# Altium PCB SDC23.PcbDoc
Units mil, origin at the board's own origin, x right, y up, seen from the top; angles counter-clockwise.
Board outline 3615 x 3030.02 mil, 2 copper layers (Top Layer, Bottom Layer); 44 components, 36 nets, 181 pads, 34 vias.
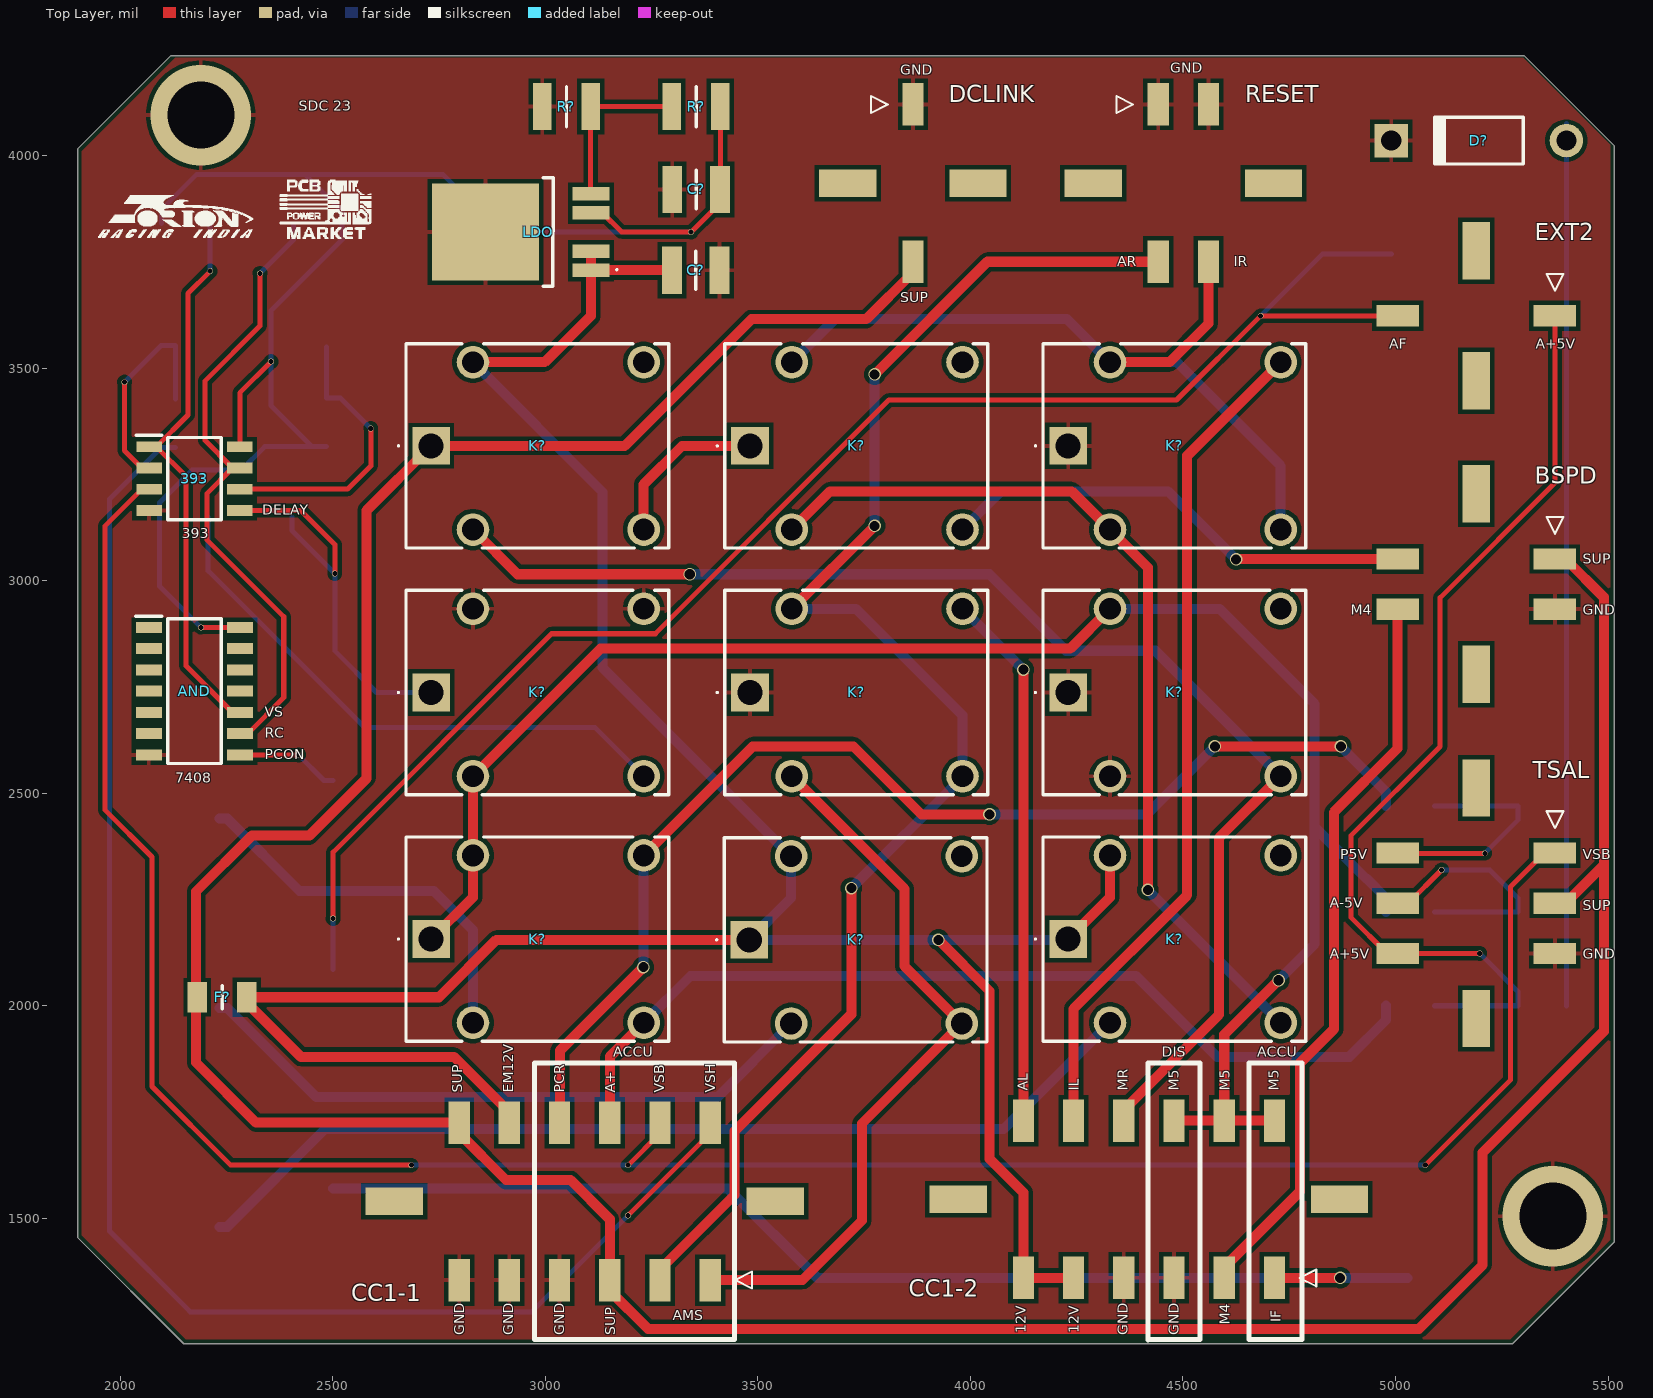
[diagram p0: Top Layer view]
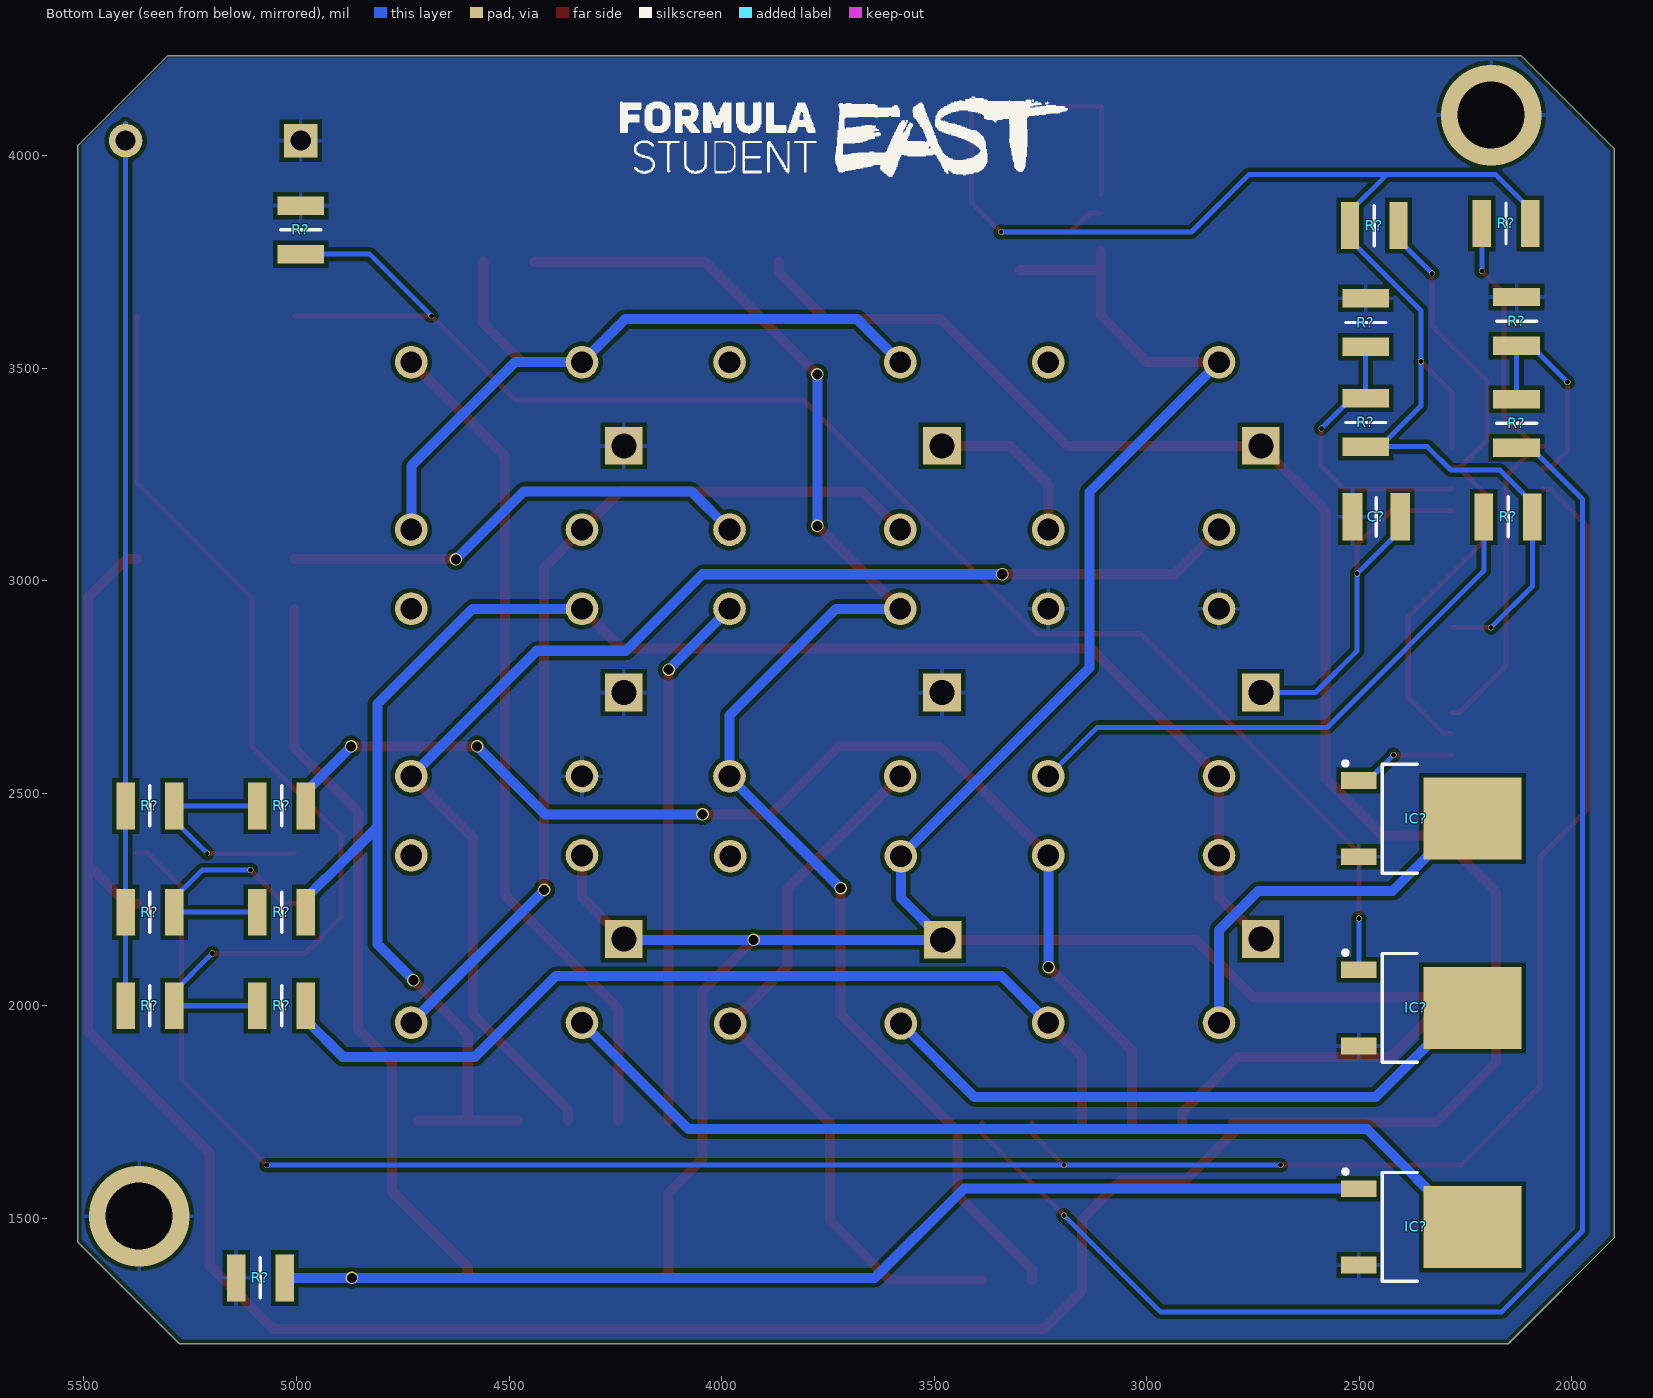
[diagram p1: Bottom Layer view, seen from below]
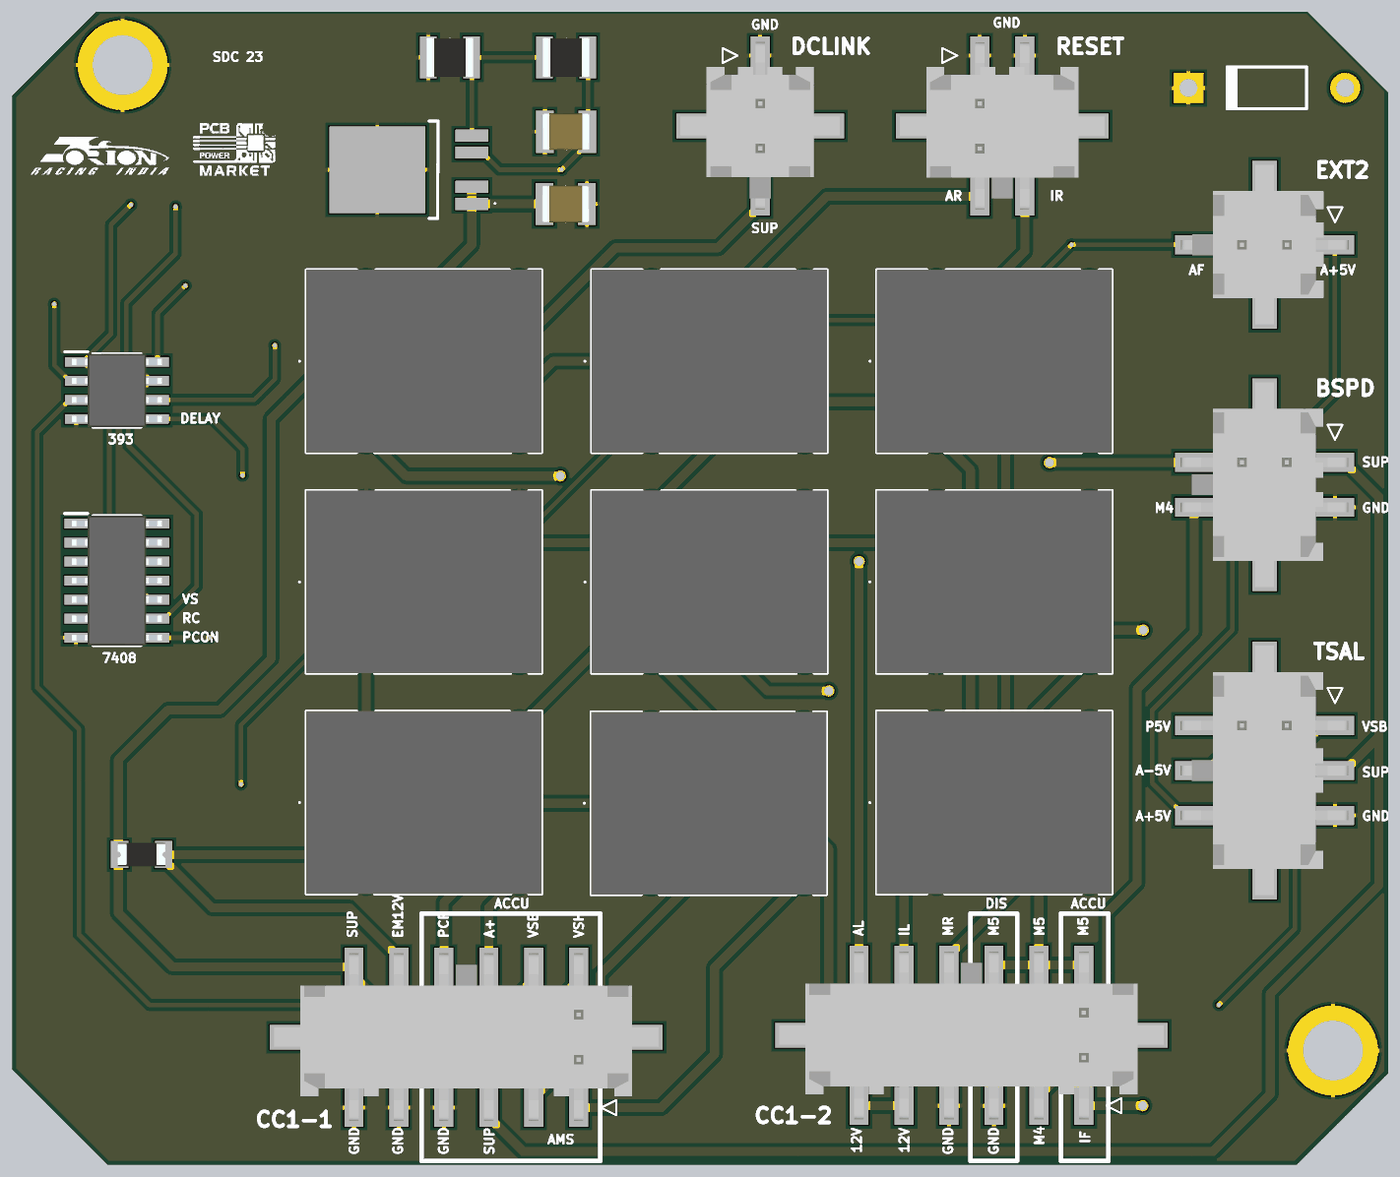
[diagram p2: 3D render of the assembled board from above, using the file's embedded part models]
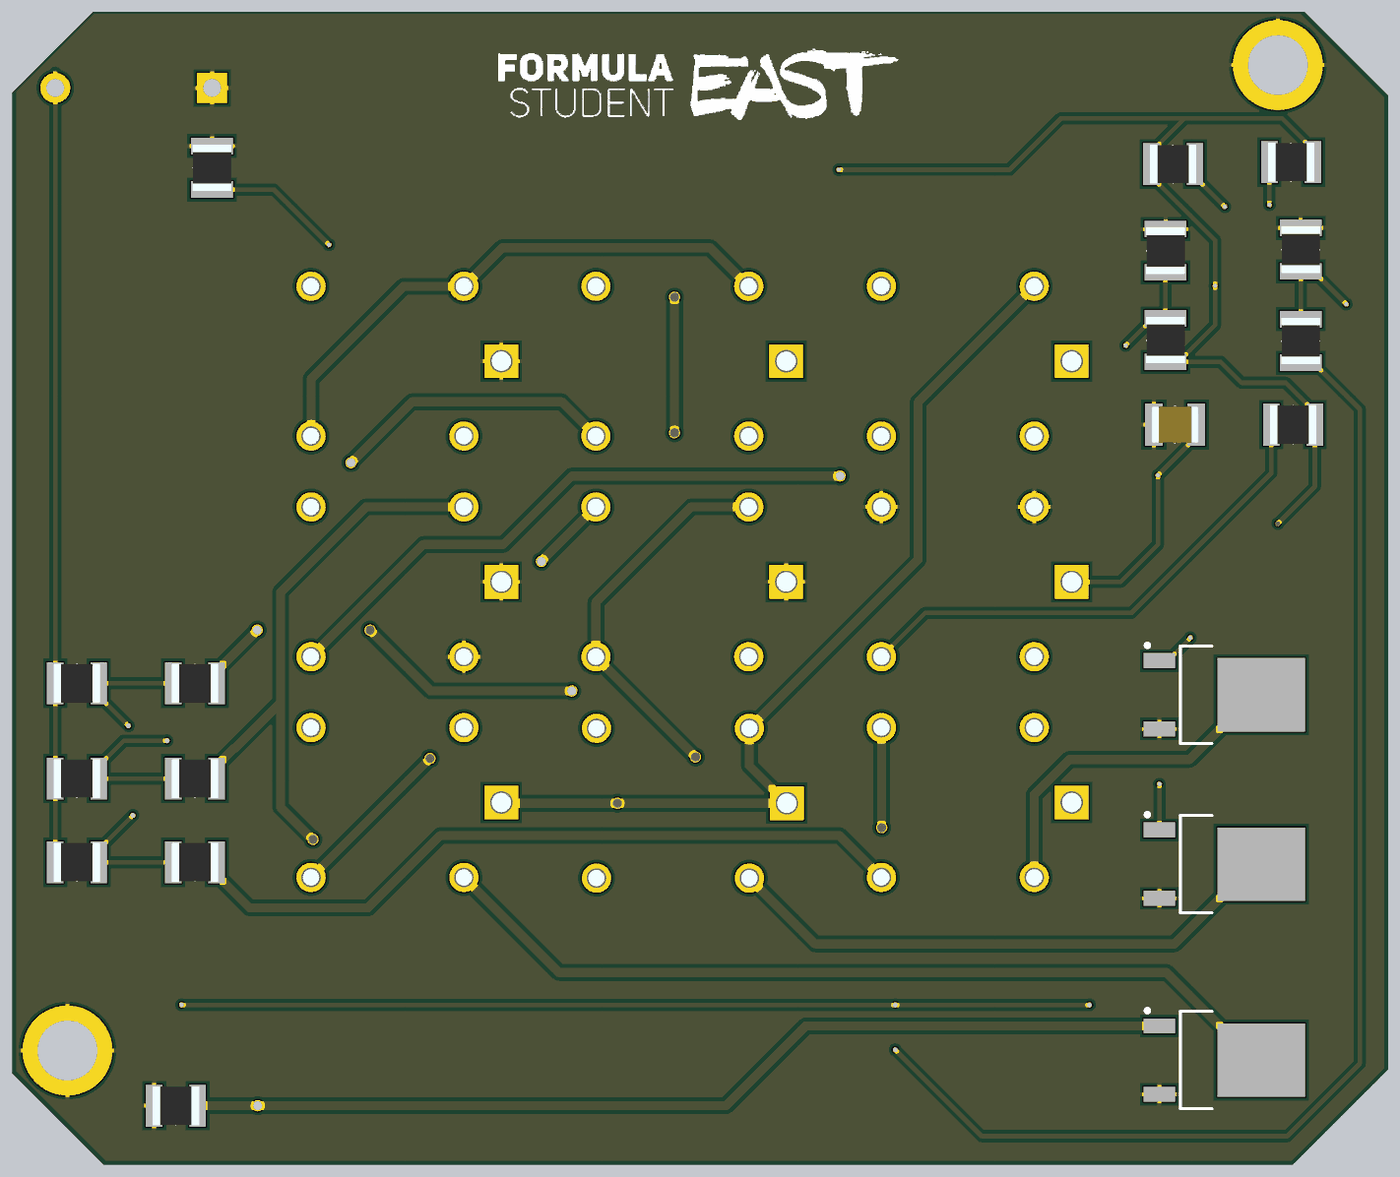
[diagram p3: 3D render of the assembled board from below, using the file's embedded part models]

## Layer stack, top to bottom
Top Solder: solder mask 0.4, Solder Resist, Dk 3.5
Top Layer: signal copper 1.4
Dielectric 1: dielectric 12.6, FR-4, Dk 4.8
Bottom Layer: signal copper 1.4
Bottom Solder: solder mask 0.4, Solder Resist, Dk 3.5

## Board outline
1900,4015 2119.98,4234.98 5302.18,4235.02 5515,4022.2 5515,1445 5275,1205 2150,1205 1900,1455

## Design rules (kind name [scope] priority, off if disabled: settings)
Clearance [All] p1: gap=10 ignorepadtopadclearanceinfootprint=FALSE
PolygonConnect [All] p1: connectstyle=Relief reliefconductorwidth=10 reliefentries=4 polygonreliefangle="90 Angle" airgapwidth=10
RoutingVias [All] p1: holewidth=23.62 width=29.53 viastyle="Through Hole" minholewidth=11.81 minwidth=13.78 maxholewidth=23.62 maxwidth=29.53
SolderMaskExpansion [All] p1: expansion=4 istentingtop=FALSE
Width [All] p1: maxlimit=23.62 minlimit=11.81 preferedwidth=23.62
30 further rules are at their usual default settings.

## Classes and differential pairs
component class SDC23: 393 AND BSPD C? CC1-1 CC1-2 D? DCLINK EXT2 F? IC? K? LDO R? RESET TSAL

## Components (designator, comment, footprint, x,y, rotation, side; value= is the part's Value field where it differs from the comment)
393 "LM393D" SOIC127P600X175-8N 2175,3240 r0 top
AND "MC74HC08ADG" SOIC127P600X175-14N 2175,2740 r0 top
BSPD "43045-0419" 43045-04YY_181920 5190,2992.01 r90 top
C? "10uF" CAPC3225X145N 2460,3150 r180 bottom
C? "10uF" CAPC3225X145N 3355,3920 r180 top
C? "10uF" CAPC3225X145N 3354.09,3730 r0 top
CC1-1 "43045-1219" 43045-12YY_181920 3092.83,1539.96 r0 top
CC1-2 "43045-1219" 43045-12YY_181920 4420,1545 r0 top
D? "Diode 1N4007" DO-41 5196,4035 r180 top
DCLINK "43045-0219" 43045-02YY_181920 3865,3935.04 r180 top
EXT2 "43045-0219" 43045-02YY_181920 5190,3622.95 r90 top
F? "NANOSMDC020F-2" NANOSMDC016F2 2240,2020 r180 top
IC? "STD10NF10T4" TO228P972X240-3N 2330,2440 r180 bottom
IC? "STD10NF10T4" TO228P972X240-3N 2330,1995 r180 bottom
IC? "STD10NF10T4" TO228P972X240-3N 2330,1480 r180 bottom
K? "SCA20-20-12VDC-C" SCA202012VDCC 3481.57,2736.85 r180 top
K? "SCA20-20-12VDC-C" SCA202012VDCC 2731.57,2736.85 r180 top
K? "SCA20-20-12VDC-C" SCA202012VDCC 2731.57,3316.85 r180 top
K? "SCA20-20-12VDC-C" SCA202012VDCC 3480,2155 r180 top
K? "SCA20-20-12VDC-C" SCA202012VDCC 4230,2156.85 r180 top
K? "SCA20-20-12VDC-C" SCA202012VDCC 3481.57,3316.85 r180 top
K? "SCA20-20-12VDC-C" SCA202012VDCC 2731.57,2156.85 r180 top
K? "SCA20-20-12VDC-C" SCA202012VDCC 4230,3316.85 r180 top
K? "SCA20-20-12VDC-C" SCA202012VDCC 4230,2736.85 r180 top
LDO "TLF1963TEATMA1" TLF1963TEATMA1 2940,3820 r90 top
R? "10K" RESC3126X60N 4990,3825 r270 bottom
R? "2.2K" RESC3126X60N 2485,3372.09 r270 bottom
R? "10K" RESC3126X60N 3355,4115 r180 top
R? "47K" RESC3126X60N 2150,3150 r0 bottom
R? "2,7K" RESC3126X60N 5345,2220 r180 bottom
R? "22K" RESC3126X60N 2130,3610 r270 bottom
R? "1K" RESC3126X60N 2130,3370 r270 bottom
R? "4.7K" RESC3126X60N 5035,2470 r180 bottom
R? "4.7K" RESC3126X60N 5035,2000 r180 bottom
R? "3.3K" RESC3126X60N 3050,4115 r180 top
R? "2.7K" RESC3126X60N 5345,2470 r180 bottom
R? "4.7K" RESC3126X60N 5035,2220 r180 bottom
R? "22K" RESC3126X60N 2485,3607.09 r270 bottom
R? "2.7K" RESC3126X60N 5345,2000 r180 bottom
R? "10K" RESC3126X60N 2155,3840 r180 bottom
R? "2.2K" RESC3126X60N 5085,1360 r180 bottom
R? "10K" RESC3126X60N 2465,3835 r0 bottom
RESET "43045-0419" 43045-04YY_181920 4500.95,3935.04 r180 top
TSAL "43045-0619" 43045-06YY_181920 5190,2241.06 r90 top

## Footprints (in the part's own frame and the unit in brackets; to place one, negate y for a bottom-side part, rotate by r counter-clockwise, add the part's x,y. Pads: shape width x height; smd on the part's side, far side on the other; paste and mask are expansions set on the pad)
43045-02YY_181920 [mm]
  rect 1.27x2.54 smd: 1(0,-4.7) 2(0,4.7)
  rect 3.43x1.65 smd: 3(3.885,0) 4(-3.885,0)
  silkscreen extent 1.5,-5.2 2.5,-4.2, body extent -5.33,-5.61 5.33,5.59, height 9.96
43045-04YY_181920 [mm]
  rect 1.27x2.54 smd: 1(1.5,-4.7) 2(-1.5,-4.7) 3(1.5,4.7) 4(-1.5,4.7)
  rect 3.43x1.65 smd: 5(5.385,0) 6(-5.385,0)
  silkscreen extent 3,-5.2 4,-4.2, body extent -6.83,-5.6 6.83,5.6, height 9.96
43045-06YY_181920 [mm]
  rect 1.27x2.54 smd: 1(3,-4.7) 2(0,-4.7) 3(-3,-4.7) 4(3,4.7) 5(0,4.7) 6(-3,4.7)
  rect 3.43x1.65 smd: 7(6.885,0) 8(-6.885,0)
  silkscreen extent 4.5,-5.2 5.5,-4.2, body extent -8.32,-5.6 8.32,5.6, height 9.96
43045-12YY_181920 [mm]
  rect 1.27x2.54 smd: 1(7.5,-4.7) 2(4.5,-4.7) 3(1.5,-4.7) 4(-1.5,-4.7) 5(-4.5,-4.7) 6(-7.5,-4.7) 7(7.5,4.7) 8(4.5,4.7) 9(1.5,4.7) 10(-1.5,4.7) 11(-4.5,4.7) 12(-7.5,4.7)
  rect 3.43x1.65 smd: 13(11.385,0) 14(-11.385,0)
  silkscreen extent 9,-5.2 10,-4.2, body extent -12.83,-5.6 12.83,5.6, height 9.95
CAPC3225X145N [mm]
  rect 1.18x2.82 smd: 1(-1.42,0) 2(1.42,0)
  silkscreen extent 0,-1.15 0,1.15, body extent -1.6,-1.25 1.6,1.25, height 1.45
DO-41 [mm] "Diode, Axial; Body 5.2 x 2.7 mm (LxDia. max), Lead Dia. 0.86 mm (max)"
  round 2 hole 1.2: 1(-5.23,0)
  rect 2x2 hole 1.2: 2(5.23,0)
  silkscreen extent -2.65,-1.4 2.75,1.4
NANOSMDC016F2 [mm]
  rect 1.16x1.81 smd: 1(-1.475,0) 2(1.475,0)
  silkscreen extent 0,-0.69 0,0.69, body extent -1.6,-0.79 1.6,0.79, height 0.82
RESC3126X60N [mm]
  rect 1.1x2.8 smd: 1(-1.45,0) 2(1.45,0)
  silkscreen extent 0,-1.2 0,1.2, body extent -1.55,-1.3 1.55,1.3, height 0.6
SCA202012VDCC [mm]
  rect 2.25x2.25 hole 1.5: 1(0,0)
  round 1.95 hole 1.3: 2(-2.5,5) 3(-12.7,5) 4(-12.7,-5) 5(-2.5,-5)
  silkscreen extent -14.2,-6.1 2,6.1, body extent -14.2,-6.1 1.5,6.1, height 13.8
SOIC127P600X175-8N [mm]
  rect 1.525x0.65 smd: 1(-2.712,1.905) 2(-2.712,0.635) 3(-2.712,-0.635) 4(-2.712,-1.905) 5(2.712,-1.905) 6(2.712,-0.635) 7(2.712,0.635) 8(2.712,1.905)
  silkscreen extent -3.48,-2.45 1.6,2.58, body extent -3,-2.45 3,2.45, height 1.75
SOIC127P600X175-14N [mm]
  rect 1.55x0.65 smd: 1(-2.725,3.81) 2(-2.725,2.54) 3(-2.725,1.27) 4(-2.725,0) 5(-2.725,-1.27) 6(-2.725,-2.54) 7(-2.725,-3.81) 8(2.725,-3.81) 9(2.725,-2.54) 10(2.725,-1.27) 11(2.725,0) 12(2.725,1.27) 13(2.725,2.54) 14(2.725,3.81)
  silkscreen extent -3.5,-4.33 1.6,4.48, body extent -3,-4.33 3,4.33, height 1.75
TLF1963TEATMA1 [mm]
  rect 0.8x2.2 smd: 1(-2.28,-4.25) 2(-1.14,-4.25) 4(1.14,-4.25) 5(2.28,-4.25)
  rect 5.8x6.4 smd: 3(0,2.05)
  silkscreen extent -3.25,-5.85 3.25,-1.4
TO228P972X240-3N [mm]
  rect 2.1x1 smd: 1(-4.35,2.28) 3(-4.35,-2.28)
  rect 5.85x4.9 smd: 4(2.45,0)
  silkscreen extent -5.28,-3.25 -0.85,3.42

## Part data
393: "Integrated Circuit", Manufacturer_Name=STMicroelectronics, Mouser Part Number=511-LM393D, Arrow Part Number=LM393D, Arrow Price/Stock=https://www.arrow.com/en/products/lm393d/stmicroelectronics?region=europe, Datasheet Link=http://www.st.com/st-web-ui/static/active/en/resource/technical/document/datasheet/CD00000465.pdf, Height=1.75mm, Manufacturer_Part_Number=LM393D, Mouser Price/Stock=https://www.mouser.co.uk/ProductDetail/STMicroelectronics/LM393D?qs=htKRmzjvioSpfPyLiLnV1A%3D%3D
AND: "Integrated Circuit", Manufacturer_Name="ON Semiconductor", Mouser Part Number=863-MC74HC08ADG, Arrow Part Number=MC74HC08ADG, Arrow Price/Stock=https://www.arrow.com/en/products/mc74hc08adg/on-semiconductor, Datasheet Link=http://www.onsemi.com/pub/Collateral/MC74HC08A-D.PDF, Height=1.75mm, Manufacturer_Part_Number=MC74HC08ADG, Mouser Price/Stock=https://www.mouser.co.uk/ProductDetail/ON-Semiconductor/MC74HC08ADG?qs=qg33o%252B8vzFqW0duu5mW%2FLA%3D%3D
BSPD RESET: "Connector", Manufacturer_Name=Molex, Mouser Part Number=538-43045-0419, Datasheet Link=https://www.molex.com/pdm_docs/sd/430450218_sd.pdf, Height=9.91mm, Manufacturer_Part_Number=43045-0419, Mouser Price/Stock=https://www.mouser.co.uk/ProductDetail/Molex/43045-0419?qs=UeCeOHRHQebVNIQyI9VWWg%3D%3D
C? C? C?: library part CC1210KKX7R8BB105, "Capacitor", Manufacturer_Name="YAGEO (PHYCOMP)", Mouser Part Number=603-CC121KKX7R8BB105, Arrow Part Number=CC1210KKX7R8BB105, Arrow Price/Stock=https://www.arrow.com/en/products/cc1210kkx7r8bb105/yageo?region=nac, Datasheet Link=https://datasheet.datasheetarchive.com/originals/distributors/Datasheets_SAMA/d9f127a4875522309d99aa7dec79633c.pdf, Height=1.45mm, Manufacturer_Part_Number=CC1210KKX7R8BB105, Mouser Price/Stock=https://www.mouser.com/Search/Refine.aspx?Keyword=603-CC121KKX7R8BB105
CC1-1 CC1-2: "Connector", Manufacturer_Name=Molex, Mouser Part Number=538-43045-1219, Datasheet Link=https://www.molex.com/pdm_docs/sd/430450218_sd.pdf, Height=9.91mm, Manufacturer_Part_Number=43045-1219, Mouser Price/Stock=https://www.mouser.co.uk/ProductDetail/Molex/43045-1219?qs=359VwiUTsp3iCU2NVYxNVg%3D%3D
D?: "1 Amp General Purpose Rectifier", Code_JEDEC=DO-204-AL, ComponentLink1Description="Manufacturer Link", ComponentLink1URL=http://www.fairchildsemi.com/, ComponentLink2Description=Datasheet, ComponentLink2URL=http://www.fairchildsemi.com/ds/1N%2F1N4001.pdf, DatasheetVersion=1998, LatestRevisionDate=17-Jul-2002, LatestRevisionNote="Re-released for DXP Platform.", PackageDescription="Diode, Axial; Body 5.2 x 2.7 mm (LxDia. max), Lead Dia. 0.86 mm (max)", PackageReference=DO-41, PackageVersion=Aug-1999, Published=8-Jun-2000, Publisher="Altium Limited"
DCLINK EXT2: "Connector", Manufacturer_Name=Molex, Mouser Part Number=538-43045-0219, Arrow Part Number=43045-0219, Arrow Price/Stock=https://www.arrow.com/en/products/43045-0219/molex?region=nac, Datasheet Link=https://www.molex.com/pdm_docs/sd/430450218_sd.pdf, Height=9.91mm, Manufacturer_Part_Number=43045-0219, Mouser Price/Stock=https://www.mouser.co.uk/ProductDetail/Molex/43045-0219?qs=4XSMV6Twtb0nwQMN7xrpYA%3D%3D
F?: "Resettable Fuse", Manufacturer_Name=LITTELFUSE, Mouser Part Number=650-NANOSMDC020F-2, Arrow Part Number=NANOSMDC020F-2, Arrow Price/Stock=https://www.arrow.com/en/products/nanosmdc020f-2/littelfuse, Datasheet Link=https://www.littelfuse.com/~/media/electronics/datasheets/resettable_ptcs/littelfuse_ptc_nanosmdc_datasheet.pdf.pdf, Height=1mm, Manufacturer_Part_Number=NANOSMDC020F-2, Mouser Price/Stock=https://www.mouser.co.uk/ProductDetail/Littelfuse/NANOSMDC020F-2?qs=iK0evp%252BCRRU6agwMt7HYjg%3D%3D
IC? IC? IC?: "Integrated Circuit", Manufacturer_Name=STMicroelectronics, Mouser Part Number=511-STD10NF10, Arrow Part Number=STD10NF10T4, Arrow Price/Stock=https://www.arrow.com/en/products/std10nf10t4/stmicroelectronics, Datasheet Link=http://www.st.com/web/en/resource/technical/document/datasheet/CD00002133.pdf, Height=2.4mm, Manufacturer_Part_Number=STD10NF10T4, Mouser Price/Stock=https://www.mouser.co.uk/ProductDetail/STMicroelectronics/STD10NF10T4?qs=El1T93pd01%2FBh%252BX9NfIsIQ%3D%3D
K? K? K? K? K? K? K? K? K?: "Relay or Contactor", Manufacturer_Name=LEONE, Datasheet Link=https://www.kuraelectronics.com/new-pdf/SCA%2020.pdf, Height=13.7mm, Manufacturer_Part_Number=SCA20-20-12VDC-C
LDO: "Integrated Circuit", Manufacturer_Name=Infineon, Mouser Part Number=726-TLF1963TEATMA1, Arrow Part Number=TLF1963TEATMA1, Arrow Price/Stock=https://www.arrow.com/en/products/tlf1963teatma1/infineon-technologies-ag?region=nac, Datasheet Link=https://www.infineon.com/dgdl/Infineon-TLF1963-DS-v01_00-EN.pdf?fileId=5546d46258fc0bc1015969d2981941e0, Height=2.35mm, Manufacturer_Part_Number=TLF1963TEATMA1, Mouser Price/Stock=https://www.mouser.co.uk/ProductDetail/Infineon-Technologies/TLF1963TEATMA1?qs=SiyfpgnvCZluIGE%2FbZiglw%3D%3D
R? R? R? R? R? R? R? R? R? R? R? R? R? R? R? R? R?: library part RC1210JR-070RL, "Resistor", Manufacturer_Name="YAGEO (PHYCOMP)", Mouser Part Number=603-RC1210JR-070RL, Arrow Part Number=RC1210JR-070RL, Arrow Price/Stock=https://www.arrow.com/en/products/rc1210jr-070rl/yageo, Datasheet Link=https://datasheet.datasheetarchive.com/originals/distributors/Datasheets_SAMA/902f9e387b938f871d31120f5fc1d65e.pdf, Height=0.6mm, Manufacturer_Part_Number=RC1210JR-070RL, Mouser Price/Stock=https://www.mouser.co.uk/ProductDetail/YAGEO/RC1210JR-070RL?qs=eVUp2xEqV%2FtpfK61W3Q4CQ%3D%3D
TSAL: "Connector", Manufacturer_Name=Molex, Mouser Part Number=538-43045-0619, Arrow Part Number=43045-0619, Arrow Price/Stock=https://www.arrow.com/en/products/43045-0619/molex, Datasheet Link=https://www.molex.com/pdm_docs/sd/430450218_sd.pdf, Height=9.91mm, Manufacturer_Part_Number=43045-0619, Mouser Price/Stock=https://www.mouser.co.uk/ProductDetail/Molex/43045-0619?qs=KC2ywxza1kr7EVu5MuTw7g%3D%3D

## Via types
v1: diameter 13.78, hole 11.81, Top Layer to Bottom Layer, 18 vias
v2: diameter 29.53, hole 23.62, Top Layer to Bottom Layer, 14 vias
v3: diameter 236.22, hole 157.48, Top Layer to Bottom Layer, 2 vias

## Nets (pads, with @x,y where several pads share a name; then routed paths per layer and width w, separated by ;. In a path a pad name is that pad's centre, name@x,y a point inside that pad or via, vN(x,y) a via of type N, cw(c..) or ccw(c..) an arc to the next point about the centre after c; other vN are vias at no path point)
01: 393.1 AND.10 R?.1@2212.09,3840 | length 1311.6
  Top Layer w11.81: 393.1 393.1@2085.45,3315 ; v1(2212.09,3727.91) 2160,3675.83 2160,3389.55 393.1@2085.45,3315 ; AND.10 2264.57,2690 2155,2799.57 2155,3245.45 393.1@2085.45,3315
  Bottom Layer w11.81: v1(2212.09,3727.91) R?.1@2212.09,3840
02: 393.7 AND.9 R?.1@2407.91,3835 | length 1477.2
  Top Layer w11.81: 393.7 393.7@2264.55,3265 ; AND.9 2300,2640 2385,2725 2385,2915 2205,3095 2205,3205.45 393.7@2264.55,3265 ; v1(2329.29,3722.91) 2329.29,3599.29 2200,3470 2200,3329.55 393.7@2264.55,3265
  Bottom Layer w11.81: v1(2329.29,3722.91) 2407.91,3801.54 R?.1@2407.91,3835
+5: 393.8 AND.14 C?.1@3410.91,3920 LDO.4 R?.1@2092.91,3150 R?.1@3412.09,4115 R?.2@2097.91,3840 R?.2@2485,3315 R?.2@2522.09,3835 | length 3834.7
  Top Layer w11.81: v1(2190,2890) AND.14 ; 393.8 2281.77,3441.77 v1(2355,3515) ; LDO.4 3134.88,3864.88 3179.76,3820 v1(3343.19,3820) 3412.09,3888.9 R?.1@3412.09,4115
  Bottom Layer w11.81: R?.2@2097.91,3840 2097.91,3873.46 2179.45,3955 2435.55,3955 ; v1(2190,2890) 2092.91,2987.09 2092.91,3150 2092.91,3183.46 2169.45,3260 2285,3260 2340,3315 R?.2@2451.54,3315 ; R?.2@2485,3315 R?.2@2451.54,3315 ; v1(3343.19,3820) 2895,3820 2760,3955 2435.55,3955 ; 2435.55,3955 2522.09,3868.46 2522.09,3801.54 2506.34,3785.79 2505.79,3785.79 2355,3635 v1(2355,3515) 2355,3411.54 R?.2@2451.54,3315
+12: C?.1@3298.19,3730 CC1-1.11 CC1-2.5 CC1-2.6 F?.1 K?.1@3480,2155 K?.1@4230,2156.85 K?.5@2830,3513.7 K?.5@3578.43,2351.85 K?.5@4328.43,2353.7 LDO.1 LDO.2 | length 6362.2
  Top Layer w23.62: K?.5@2830,3513.7 2998.7,3513.7 3107.32,3622.32 LDO.1 ; CC1-1.11 2915.67,1750 2785.67,1880 2425.27,1880 2298.07,2007.2 F?.1 2750,2020 2885,2155 K?.1@3480,2155 ; LDO.2 LDO.1 ; C?.1@3298.19,3730 3297.95,3730.24 LDO.1 ; v2(3925,2155) 4045,2035 4045,1640 4124.72,1560.28 CC1-2.6 CC1-2.5 ; K?.1@4228.15,2155 4230,2156.85 4328.43,2255.28 K?.5@4328.43,2353.7
  Bottom Layer w23.62: K?.5@2830,3513.7 3135,3208.7 3135,2795.28 3578.43,2351.85 3578.43,2253.43 3480,2155 v2(3925,2155) 4228.15,2155 K?.1@4230,2156.85
A: CC1-1.1 K?.2@3580,2540 K?.3@3980,1958.15 | length 1722.7
  Top Layer w23.62: CC1-1.1 3604.92,1354.92 3745,1495 3745,1723.15 K?.3@3979.85,1958 ; K?.2@3580,2540 3845,2275 3845,2093.15 K?.3@3980,1958.15
AIR+VE: CC1-1.9 K?.3@3231.57,1960 R?.2@4977.91,2000 | length 2207.9
  Top Layer w23.62: CC1-1.9 3151.89,1880.32 K?.3@3231.57,1960
  Bottom Layer w23.62: K?.3@3231.57,1960 3341.57,2070 4390,2070 4580,1880 4891.38,1880 4977.91,1966.54 R?.2@4977.91,2000
"AIR+VE 5V": EXT2.1 R?.1@5092.09,2000 R?.2@5287.91,2000 TSAL.6 | length 2308.5
  Top Layer w11.81: v1(5198.19,2123.19) 5005.2,2123.19 TSAL.6 4979.96,2122.95 4895,2207.92 4895,2400 5105,2610 5105,2960 5375.04,3230.04 EXT2.1
  Bottom Layer w11.81: R?.1@5092.09,2000 5287.91,2000 5287.91,2033.46 v1(5198.19,2123.19)
AMSFAULT: EXT2.2 IC?.1@2501.26,2084.76 R?.2@4990,3767.91 | length 3670.3
  Top Layer w11.81: v1(2501.26,2205.01) 2501.26,2361.26 3015,2875 3258.98,2875 3525.71,3141.73 3525.71,3142.49 3808.22,3425 4485,3425 v1(4682.95,3622.95) EXT2.2
  Bottom Layer w11.81: IC?.1@2501.26,2084.76 v1(2501.26,2205.01) ; v1(4682.95,3622.95) 4827.91,3767.91 R?.2@4990,3767.91
AMSLED: CC1-2.12 K?.4@3981.57,2933.7 | length 1263
  Top Layer w23.62: CC1-2.12 v2(4124.72,2790.55)
  Bottom Layer w23.62: K?.4@3981.57,2933.7 v2(4124.72,2790.55)
AR: CC1-1.2 K?.3@3981.57,2540 K?.5@3580,2933.7 RESET.3 | length 3537.2
  Top Layer w23.62: CC1-1.2 3270,1379.92 3445,1554.92 3445,1705 3720,1980 v2(3720,2276.6) ; K?.5@3580,2933.7 v2(3775,3128.7) ; v2(3775,3485) 4040,3750 RESET.3
  Bottom Layer w23.62: K?.5@3580,2933.7 3731.3,2933.7 3981.57,2683.43 3981.57,2540 3981.57,2538.17 v2(3720,2276.6) ; v2(3775,3128.7) v2(3775,3485)
DELAY: 393.5 C?.2@2404.09,3150 K?.1@2731.57,2736.85 | length 948.6
  Top Layer w11.81: 393.5 2425,3165 2505,3085 v1(2505,3016.81)
  Bottom Layer w11.81: C?.2@2404.09,3150 2404.09,3117.72 v1(2505,3016.81) 2505,2835 2603.15,2736.85 K?.1@2731.57,2736.85
GND: 393.4 AND.7 BSPD.2 C?.1@2515.91,3150 C?.2@3299.09,3920 C?.2@3410,3730 CC1-1.4 CC1-1.5 CC1-1.6 CC1-2.3 CC1-2.4 D?.2 DCLINK.1 IC?.3 K?.1@3481.57,2736.85 K?.1@4230,2736.85 K?.1@4230,3316.85 K?.2@4328.43,2540 K?.4@3231.57,2933.7 K?.5@2830,2933.7 LDO.3 R?.1@2130,3667.09 R?.1@2485,3664.17 R?.1@4990,3882.09 R?.1@5142.09,1360 R?.2@2992.91,4115 RESET.1 RESET.2 TSAL.3
  other v3: 5370,1505 2190,4095
IMDFAULT: CC1-2.1 IC?.1@2501.26,1569.76 R?.2@5027.91,1360 | length 2768.3
  Top Layer w23.62: CC1-2.1 v2(4870,1360) v2(4870,1360)
  Bottom Layer w23.62: IC?.1@2501.26,1569.76 3430.24,1569.76 3640,1360 v2(4870,1360) R?.2@5027.91,1360
IMDLED: CC1-2.11 K?.4@4730,3513.7 | length 1985.5
  Top Layer w23.62: CC1-2.11 4242.83,1992.83 4510,2260 4510,3293.7 K?.4@4730,3513.7
IR: K?.3@4730,3120 K?.5@3580,3513.7 K?.5@4328.43,3513.7 RESET.4 | length 1899.3
  Top Layer w23.62: K?.5@4328.43,3513.7 4468.7,3513.7 4560,3605 RESET.4
  Bottom Layer w23.62: K?.5@3580,3513.7 3681.3,3615 4227.13,3615 4328.43,3513.7 4486.3,3513.7 4730,3270 K?.3@4730,3120
LVMS: BSPD.1 CC1-1.3 CC1-1.12 DCLINK.2 F?.2 K?.1@2731.57,3316.85 TSAL.2 | length 8543.4
  Top Layer w23.62: DCLINK.2 3865,3725 3755,3615 3485,3615 3186.85,3316.85 2731.57,3316.85 2580,3165.28 2580,2535 2445,2400 2310,2400 2178.74,2268.74 2178.74,2023.19 F?.2 2178.74,2016.81 2178.74,1866.26 2320,1725 CC1-1.12 2797.56,1700 2907.56,1590 3060,1590 3151.89,1498.11 CC1-1.3 3151.89,1329.92 3241.81,1240 5055,1240 5205,1390 5205,1655 5490,1940 5490,2331.02 ; TSAL.2 5400.04,2241.06 5490,2331.02 ; BSPD.1 5400.04,3051.06 5490,2961.1 5490,2331.02
M1: K?.1@3481.57,3316.85 K?.3@3231.57,3120 | length 394
  Top Layer w23.62: K?.3@3231.57,3120 3231.57,3226.57 3321.85,3316.85 K?.1@3481.57,3316.85
M4: BSPD.4 CC1-2.2 | length 1741.9
  Top Layer w23.62: CC1-2.2 4597.17,1384.96 4775,1562.8 4775,1865 4855,1945 4855,2455 5004.96,2604.96 BSPD.4
M5: CC1-2.7 CC1-2.8 CC1-2.9 K?.1@2731.57,2156.85 K?.2@2830,2540 K?.5@2830,2353.7 K?.5@4328.43,2933.7 R?.2@4977.91,2220 | length 4234.4
  Top Layer w23.62: K?.1@2731.57,2156.85 2830,2255.28 2830,2353.7 2830,2540 3130,2840 4234.73,2840 K?.5@4328.43,2933.7 ; CC1-2.9 CC1-2.8 ; CC1-2.7 CC1-2.8 ; v2(4725,2060) 4597.17,1932.17 CC1-2.8
  Bottom Layer w23.62: K?.5@4328.43,2933.7 4586.3,2933.7 4810,2710 4810,2420 ; v2(4725,2060) 4810,2145 4810,2420 ; R?.2@4977.91,2220 4977.91,2253.46 4932.22,2299.15 4930.85,2299.15 4810,2420
"M5 5V": R?.1@5092.09,2220 R?.2@5287.91,2220 TSAL.5 | length 572.1
  Top Layer w11.81: TSAL.5 5029.96,2241.06 v1(5108.4,2319.5)
  Bottom Layer w11.81: R?.1@5092.09,2220 5287.91,2220 5287.91,2253.46 5221.88,2319.5 v1(5108.4,2319.5)
MR: CC1-2.10 K?.2@2830,3120 K?.3@4730,2540 | length 3103.1
  Top Layer w23.62: K?.2@2830,3120 2935,3015 v2(3340,3015) ; CC1-2.10 4360.94,1755.04 4585,1979.09 4585,2395 K?.3@4730,2540
  Bottom Layer w23.62: v2(3340,3015) 4045,3015 4225,2835 4435,2835 K?.3@4730,2540
Net393_2: 393.2 R?.1@2130,3427.09 R?.2@2130,3552.91 | length 516.9
  Top Layer w11.81: v1(2010.38,3466.76) 2010.38,3305.63 2051,3265 393.2
  Bottom Layer w11.81: v1(2010.38,3466.76) 2096.54,3552.91 2130,3552.91 R?.1@2130,3427.09
Net393_6: 393.6 R?.1@2485,3429.17 R?.2@2485,3550 | length 674.1
  Top Layer w11.81: 393.6 2535,3215 2590,3270 2590,3357.64 v1(2589.62,3358.01)
  Bottom Layer w11.81: R?.2@2485,3550 2485,3429.17 2518.46,3429.17 v1(2589.62,3358.01)
NetAND_8: AND.8 IC?.1@2501.26,2529.76 | length 244.3
  Top Layer w11.81: AND.8 v1(2420,2590)
  Bottom Layer w11.81: v1(2420,2590) 2420.38,2589.62 2420.38,2588.99 2479.61,2529.76 IC?.1@2501.26,2529.76
NetD?_1: D?.1 R?.1@5402.09,2000 R?.1@5402.09,2220 R?.1@5402.09,2470 | length 2075
  Bottom Layer w11.81: R?.1@5402.09,2000 5402.09,2220 5402.09,2470 5402.09,4075
NetIC?_4: IC?.4@2233.54,2440 K?.2@2830,1960 | length 922.9
  Bottom Layer w23.62: IC?.4@2233.54,2440 2252.24,2440 2422.24,2270 2737.85,2270 2830,2177.85 K?.2@2830,1960
NetK?_2: K?.2@3580,3120 K?.2@4328.43,3120 K?.3@4730,1960 | length 2149.3
  Top Layer w23.62: K?.2@3580,3120 3670,3210 4238.43,3210 4417.5,3030.93 v2(4417.5,2272.5)
  Bottom Layer w23.62: v2(4417.5,2272.5) K?.3@4730,1960
NetK?_3: K?.3@3231.57,2540 R?.2@2207.09,3150 | length 1351.6
  Bottom Layer w11.81: R?.2@2207.09,3150 2207.09,3022.91 2575,2655 3116.57,2655 K?.3@3231.57,2540
NetLDO_5: LDO.5 R?.1@3107.09,4115 R?.2@3297.91,4115 | length 396.2
  Top Layer w11.81: LDO.5 3107.09,3910 3107.09,4115 R?.2@3297.91,4115
PCR: CC1-1.10 K?.4@3231.57,2353.7 R?.2@4977.91,2470 | length 2773.3
  Top Layer w23.62: CC1-1.10 3034.39,1725.61 3034.39,1894.39 v2(3230.79,2090.79) ; K?.4@3231.57,2353.7 3487.87,2610 3725,2610 3885,2450 v2(4045,2450) ; v2(4575,2610) v2(4871.38,2610)
  Bottom Layer w23.62: v2(3230.79,2090.79) 3230.79,2352.91 K?.4@3231.57,2353.7 ; v2(4045,2450) 4415,2450 v2(4575,2610) ; v2(4871.38,2610) 4977.91,2503.46 R?.2@4977.91,2470
"PCR 5V": R?.1@5092.09,2470 R?.2@5287.91,2470 TSAL.4 | length 544.7
  Top Layer w11.81: TSAL.4 5005.51,2358.62 v1(5210,2358.62)
  Bottom Layer w11.81: R?.1@5092.09,2470 5287.91,2470 5287.91,2436.54 v1(5210,2358.62)
SDCBSPD: BSPD.3 K?.3@3981.57,3120 | length 1127.4
  Top Layer w23.62: v2(4625,3050) 4625.53,3050.53 5004.43,3050.53 BSPD.3
  Bottom Layer w23.62: K?.3@3981.57,3120 4071.57,3210 4465,3210 v2(4625,3050)
VS_BAT_IN: 393.3 CC1-1.8 TSAL.1 | length 5581.3
  Top Layer w11.81: 393.3 2051,3215 1965,3129 1965,2460 2075,2350 2075,1810 2260,1625 v1(2685,1625) ; v1(3195,1625) 3270,1700 CC1-1.8 ; v1(5070,1625) 5270,1825 5270,2279.13 5350.04,2359.17 TSAL.1
  Bottom Layer w11.81: v1(2685,1625) v1(5070,1625)
VS_HV_IN: CC1-1.7 R?.2@2130,3312.91 | length 3617.5
  Top Layer w11.81: v1(3195,1506.89) 3388.11,1700 CC1-1.7
  Bottom Layer w11.81: R?.2@2130,3312.91 2096.54,3312.91 1975,3191.38 1975,1470 2165,1280 2968.11,1280 v1(3195,1506.89)
X1: IC?.4@2233.54,1480 K?.2@4328.43,1960 | length 2293.7
  Bottom Layer w23.62: IC?.4@2233.54,1480 2252.24,1480 2482.24,1710 4078.43,1710 K?.2@4328.43,1960
X2: IC?.4@2233.54,1995 K?.2@3578.43,1958.15 | length 1503.6
  Bottom Layer w23.62: IC?.4@2233.54,1995 2252.24,1995 2462.24,1785 3405.28,1785 K?.2@3578.43,1958.15
pads on no net: AND.1 AND.2 AND.3 AND.4 AND.5 AND.6 AND.11 AND.12 AND.13 BSPD.5 BSPD.6 CC1-1.13 CC1-1.14 CC1-2.13 CC1-2.14 DCLINK.3 DCLINK.4 EXT2.3 EXT2.4 K?.4@3231.57,3513.7 K?.4@3980,2351.85 K?.4@3981.57,3513.7 K?.4@4730,2353.7 K?.4@4730,2933.7 RESET.5 RESET.6 TSAL.7 TSAL.8

## Polygon pours and split planes (outlines as drawn)
GND on Top Layer "NONET_L-01_P-001" (solid, pour order 1): 5300,4230 5505,4025 5505,1450 5270,1215 2155,1215 1910,1460 1910,4010 2130,4230
GND on Bottom Layer "NONET_L-01_P-001" (solid, pour order 0): 5300.13,4230 5505,4025.13 5505,1450 5270,1215 2155,1215 1910,1460 1910,4010 2130,4230 2225,4230

## Silkscreen, mask and mechanical layers (free items; w line width, h text height)
Top Overlay:
  drawing of 62 lines, arcs and shapes, not listed
  text "GND" at 4470,4195 h23.62
  text "GND" at 3835,4190 h23.62
  text "SDC 23" at 2420,4105 h23.62
  text "AR" at 4345,3740 h23.62
  text "IR" at 4620,3740 h23.62
  text "SUP" at 3835,3655 h23.62
  text "AF" at 4985,3545 h23.62
  text "A+5V" at 5330,3545 h23.62
  text "DELAY" at 2335,3155 h23.62
  text "393" at 2145,3100 h23.62
  text "SUP" at 5440,3040 h23.62
  text "M4" at 4895,2920 h23.62
  text "GND" at 5440,2920 h23.62
  text "VS" at 2340,2680 h23.62
  text "RC" at 2340,2630 h23.62
  text "PCON" at 2340,2580 h23.62
  text "7408" at 2130,2525 h23.62
  text "P5V" at 4870,2345 h23.62
  text "VSB" at 5440,2345 h23.62
  text "A-5V" at 4845,2230 h23.62
  text "SUP" at 5440,2225 h23.62
  text "A+5V" at 4845,2110 h23.62
  text "GND" at 5440,2110 h23.62
  text "ACCU" at 3160,1880 h23.62
  text "DIS" at 4450,1880 h23.62
  text "ACCU" at 4675,1880 h23.62
  text "AL" at 4135,1800 h23.62 r90
  text "IL" at 4255,1800 h23.62 r90
  text "MR" at 4370,1800 h23.62 r90
  text "M5" at 4490,1800 h23.62 r90
  text "M5" at 4610,1800 h23.62 r90
  text "M5" at 4725,1800 h23.62 r90
  text "SUP" at 2805,1795 h23.62 r90
  text "EM12V" at 2925,1795 h23.62 r90
  text "PCR" at 3045,1795 h23.62 r90
  text "A+" at 3165,1795 h23.62 r90
  text "VSB" at 3280,1795 h23.62 r90
  text "VSH" at 3400,1795 h23.62 r90
  text "AMS" at 3300,1260 h23.62
  text "IF" at 4730,1255 h23.62 r90
  text "M4" at 4610,1250 h23.62 r90
  text "12V" at 4130,1230 h23.62 r90
  text "12V" at 4255,1230 h23.62 r90
  text "GND" at 2810,1225 h23.62 r90
  text "GND" at 2925,1225 h23.62 r90
  text "GND" at 3045,1225 h23.62 r90
  text "SUP" at 3165,1225 h23.62 r90
  text "GND" at 4370,1225 h23.62 r90
  text "GND" at 4490,1225 h23.62 r90
Bottom Overlay:
  drawing of 17 lines, arcs and shapes, not listed